# EAGLE board urov schematic_3 (EAGLE 7.5.0)
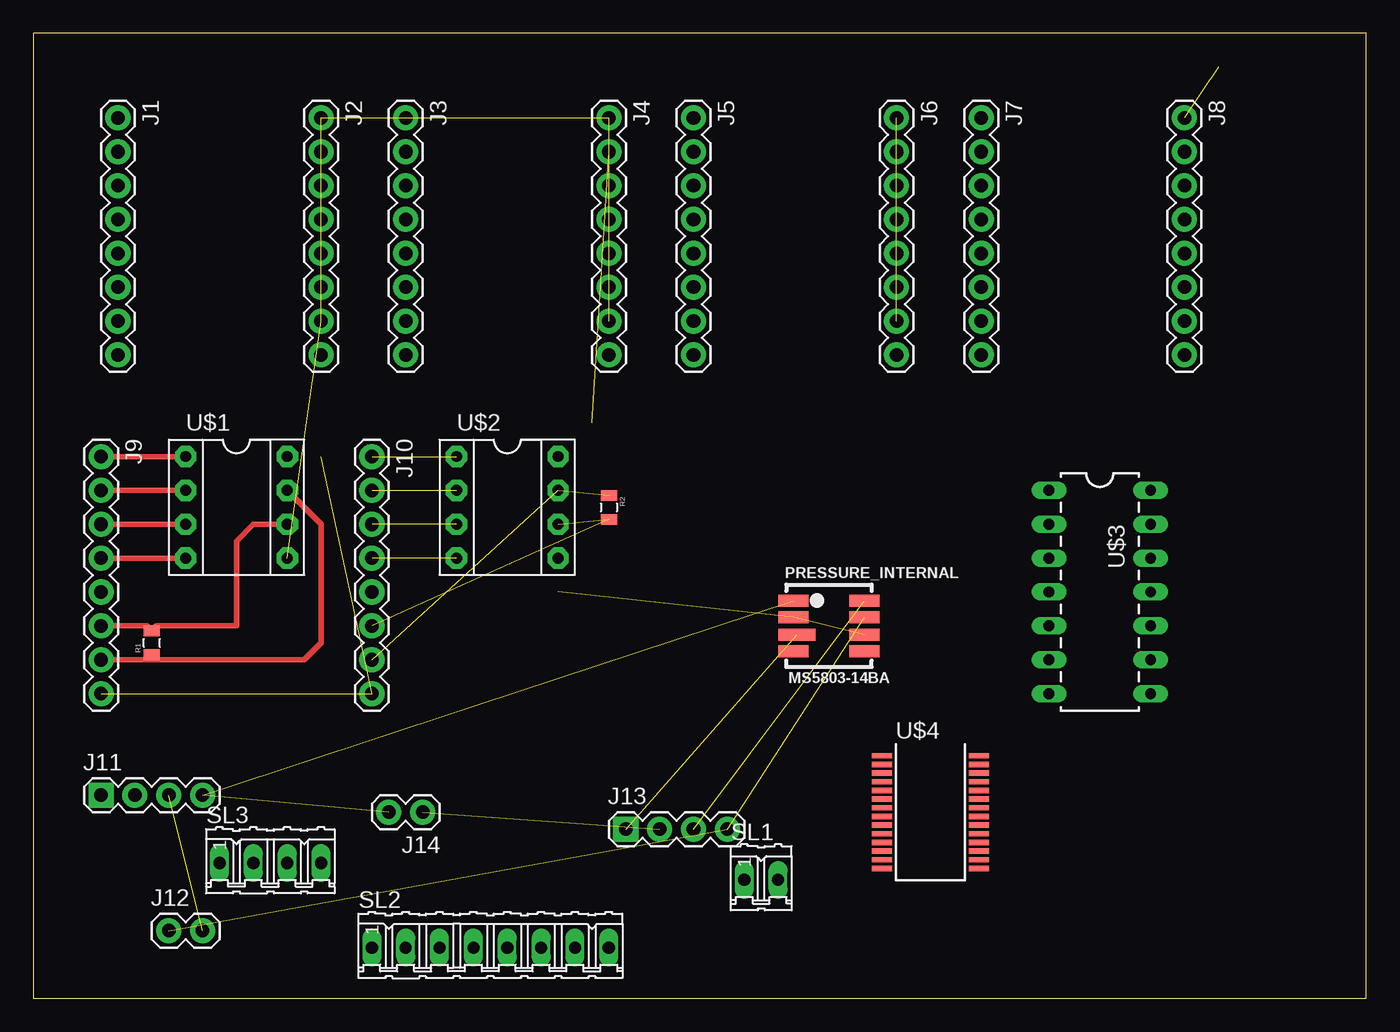
[diagram p0: board, top side]
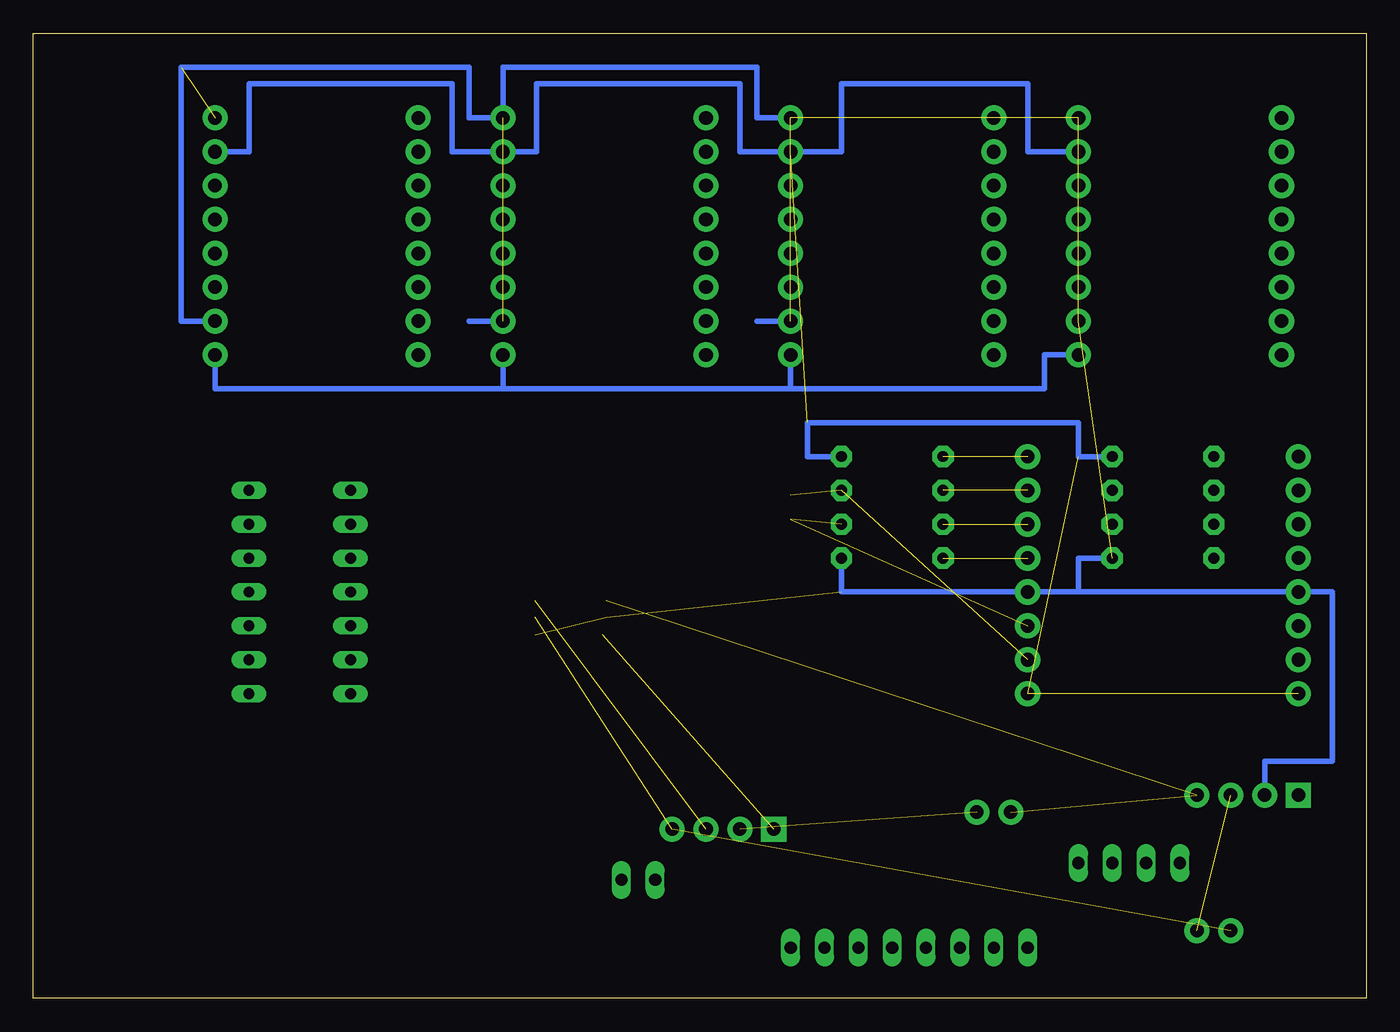
[diagram p1: board, bottom side, seen from below]

Size 100 x 72.38 mm. Coordinates in mm from the lower left corner, seen from the top.
Outline: 0,0 100,0 100,72.38 0,72.38 0,0
Copper layers (1*16): Top 0.035mm / dielectric 1.5mm / Bottom 0.035mm
Design rules "default": minimum track width 10mil, minimum drill 24mil, track to track 8mil, track to pad 8mil, pad to pad 8mil, via to via 8mil, smd to smd 8mil, copper to edge 40mil, drill to drill 8mil, minimum pad ring 10mil, minimum via ring 8mil, stop-mask expansion 4mil, vias tented up to drill 0mil, thermal gap 10mil

## Footprints (pad centres in the part's own frame; a part is rotated, then mirrored left to right if it is on the bottom)
1X08_ROUND = drill 1.016 pad 1.88: 1 0,0; 2 2.54,0; 3 5.08,0; 4 7.62,0; 5 10.16,0; 6 12.7,0; 7 15.24,0; 8 17.78,0
1X04 = drill 1.016 pad 1.88 square: 1 0,0 | drill 1.016 pad 1.88: 2 2.54,0; 3 5.08,0; 4 7.62,0
1X02 = drill 1.016 pad 1.88: 1 0,0; 2 2.54,0
MS5803 = smd 2.25 x 0.9: 1 -2.675,1.9; 2 -2.675,0.65; 4 -2.675,-1.9; 5 2.675,-1.9; 6 2.675,-0.65; 7 2.675,0.65; 8 2.675,1.9 | smd 2.8 x 0.9: 3 -2.4,-0.65
0805 = smd 0.8 x 1.2: 1 -0.9,0; 2 0.9,0
02P = drill 0.914 long: 1 -1.27,0; 2 1.27,0
08P = drill 0.914 long: 1 -8.89,0; 2 -6.35,0; 3 -3.81,0; 4 -1.27,0; 5 1.27,0; 6 3.81,0; 7 6.35,0; 8 8.89,0
04P = drill 0.914 long: 1 -3.81,0; 2 -1.27,0; 3 1.27,0; 4 3.81,0
DIL08 = drill 0.813 pad 1.6 octagon: 1 -3.81,-3.81; 2 -1.27,-3.81; 3 1.27,-3.81; 4 3.81,-3.81; 5 3.81,3.81; 6 1.27,3.81; 7 -1.27,3.81; 8 -3.81,3.81
DIL14 = drill 0.813 long: 1 -8.89,-3.81; 2 -6.35,-3.81; 3 -3.81,-3.81; 4 -1.27,-3.81; 5 1.27,-3.81; 6 3.81,-3.81; 7 6.35,-3.81; 8 6.35,3.81; 9 3.81,3.81; 10 1.27,3.81; 11 -1.27,3.81; 12 -3.81,3.81; 13 -6.35,3.81; 14 -8.89,3.81
28-SSOP = smd 0.4 x 1.5: 1 -4.225,-3.625; 2 -3.575,-3.625; 3 -2.925,-3.625; 4 -2.275,-3.625; 5 -1.625,-3.625; 6 -0.975,-3.625; 7 -0.325,-3.625; 8 0.325,-3.625; 9 0.975,-3.625; 10 1.625,-3.625; 11 2.275,-3.625; 12 2.925,-3.625; 13 3.575,-3.625; 14 4.225,-3.625; 15 4.225,3.625; 16 3.575,3.625; 17 2.925,3.625; 18 2.275,3.625; 19 1.625,3.625; 20 0.975,3.625; 21 0.325,3.625; 22 -0.325,3.625; 23 -0.975,3.625; 24 -1.625,3.625; 25 -2.275,3.625; 26 -2.925,3.625; 27 -3.575,3.625; 28 -4.225,3.625

## Placement (x,y rotation side)
J1  [1X08_ROUND]  6.35,66.04 270 top
J2  [1X08_ROUND]  21.59,66.04 270 top
J3  [1X08_ROUND]  27.94,66.04 270 top
J4  [1X08_ROUND]  43.18,66.04 270 top
J5  [1X08_ROUND]  49.53,66.04 270 top
J6  [1X08_ROUND]  64.77,66.04 270 top
J7  [1X08_ROUND]  71.12,66.04 270 top
J8  [1X08_ROUND]  86.36,66.04 270 top
J9  [1X08_ROUND]  5.08,40.64 270 top
J10  [1X08_ROUND]  25.4,40.64 270 top
J11  [1X04]  5.08,15.24 0 top
J12  [1X02]  10.16,5.08 0 top
J13  [1X04]  44.45,12.7 0 top
J14  [1X02]  29.21,13.97 180 top
PRESSURE_INTERNAL  MS5803-14BA  [MS5803]  59.69,27.94 0 top
R1  120  [0805]  8.89,26.67 90 top
R2  120  [0805]  43.18,36.83 270 top
SL1  [02P]  54.61,8.89 0 top
SL2  [08P]  34.29,3.81 0 top
SL3  [04P]  17.78,10.16 0 top
U$1  MAX485DIL  [DIL08]  15.24,36.83 270 top
U$2  MAX485DIL  [DIL08]  35.56,36.83 270 top
U$3  ATTINY84ATTINY84-20PU  [DIL14]  80.01,29.21 270 top
U$4  MAX4574A  [28-SSOP]  67.31,13.97 270 top

## Library data of the parts
J1-J10 = SparkFun-Connectors; PROD_ID: CONN-08437
J11 J13 = SparkFun-Connectors; PROD_ID: CONN-09696
J12 J14 = SparkFun-Connectors
PRESSURE_INTERNAL = SparkFun-Sensors; PROD_ID: IC-12111
R1 R2 = SparkFun-Passives
SL1-SL3 = con-amp-quick; OC_FARNELL: unknown; OC_NEWARK: unknown
U$1-U$3 = SparkFun-DigitalIC
U$4 = UROV_Accessories

## Nets
1A_1: J2.4
1A_2: J4.4
1A_3: J6.4
1A_4: J8.4
1B_1: J2.3
1B_2: J4.3
1B_3: J6.3
1B_4: J8.3
2A_1: J2.5
2A_2: J4.5
2A_3: J6.5
2A_4: J8.5
2B_1: J2.6
2B_2: J4.6
2B_3: J6.6
2B_4: J8.6
A_DIP8_1: J9.6 R1.2 U$1.6
A_DIP8_2: J10.6 R2.2 U$2.6
B_DIP8_1: J9.7 R1.1 U$1.7
B_DIP8_2: J10.7 R2.1 U$2.7
DIRECTION_1: J1.8
DIRECTION_2: J3.8
DIRECTION_3: J5.8
DIRECTION_4: J7.8
GND: J2.1 J2.7 J4.1 J4.7 J6.1 J6.7 J8.1 J8.7 J9.5 J10.5 J11.2 PRESSURE_INTERNAL.2 PRESSURE_INTERNAL.6 U$1.5 U$2.5
MISO: J13.3 PRESSURE_INTERNAL.8
MOSI: J12.1 J13.4 PRESSURE_INTERNAL.7
MS1_1: J1.2
MS1_2: J3.2
MS1_3: J5.2
MS1_4: J7.2
MS2_1: J1.3
MS2_2: J3.3
MS2_3: J5.3
MS2_4: J7.3
MS3_1: J1.4
MS3_2: J3.4
MS3_3: J5.4
MS3_4: J7.4
N$1: J9.1 U$1.1
N$2: J9.2 U$1.2
N$3: J9.3 U$1.3
N$4: J9.4 U$1.4
N$10: J10.1 U$2.1
N$11: J10.2 U$2.2
N$13: J10.3 U$2.3
N$14: J10.4 U$2.4
SCL: J11.4 J14.2 PRESSURE_INTERNAL.1
SCLK: J13.2 J14.1
SDA: J11.3 J12.2
SS: J13.1 PRESSURE_INTERNAL.3
STEP_1: J1.7
STEP_2: J3.7
STEP_3: J5.7
STEP_4: J7.7
V3.3: PRESSURE_INTERNAL.5
VDD: J2.2 J4.2 J6.2 J8.2 J9.8 J10.8 U$1.8 U$2.8
VDD_9DOF_3.3V: J11.1
VMOT: J2.8 J4.8 J6.8 J8.8
¬ENABLE_1: J1.1
¬ENABLE_2: J3.1
¬ENABLE_3: J5.1
¬ENABLE_4: J7.1
¬RESET_1: J1.5
¬RESET_2: J3.5
¬RESET_3: J5.5
¬RESET_4: J7.5
¬SLEEP_1: J1.6
¬SLEEP_2: J3.6
¬SLEEP_3: J5.6
¬SLEEP_4: J7.6

## Tracks (layer width: path | path; a pad name or v marks a point on that pad's centre or on a via)
A_DIP8_1
  Top 0.406: J9.6 8.52,27.94 R1.2 9.26,27.94 15.24,27.94 15.24,34.29 16.51,35.56 U$1.6
A_DIP8_2  (2 unrouted)
B_DIP8_1
  Top 0.406: R1.1 8.52,25.4 J9.7 20.32,25.4 21.59,26.67 21.59,35.56 U$1.7
B_DIP8_2  (2 unrouted)
GND  (8 unrouted)
  Bottom 0.406: J4.1 45.72,66.04 45.72,69.85 64.77,69.85 J6.1 67.31,66.04 67.31,69.85 88.9,69.85 88.9,50.8 J8.7 | 21.59,30.48 J9.5 2.54,30.48 2.54,17.78 7.62,17.78 J11.2 | 21.59,30.48 21.59,33.02 U$1.5 | 21.59,30.48 J10.5 39.37,30.48 U$2.5 | J4.7 45.72,50.8 | J6.7 67.31,50.8
MISO  (1 unrouted)
MOSI  (2 unrouted)
N$1
  Top 0.406: J9.1 U$1.1
N$2
  Top 0.406: U$1.2 J9.2
N$3
  Top 0.406: J9.3 U$1.3
N$4
  Top 0.406: U$1.4 J9.4
N$10  (1 unrouted)
N$11  (1 unrouted)
N$13  (1 unrouted)
N$14  (1 unrouted)
SCL  (2 unrouted)
SCLK  (1 unrouted)
SDA  (1 unrouted)
SS  (1 unrouted)
VDD  (3 unrouted)
  Bottom 0.406: J2.2 25.4,63.5 25.4,68.58 39.37,68.58 39.37,63.5 J4.2 46.99,63.5 46.99,68.58 62.23,68.58 62.23,63.5 J6.2 68.58,63.5 68.58,68.58 83.82,68.58 83.82,63.5 J8.2 | U$2.8 41.91,40.64 41.91,43.18 21.59,43.18 21.59,40.64 U$1.8
VMOT
  Bottom 0.406: J2.8 24.13,48.26 24.13,45.72 43.18,45.72 | J4.8 43.18,45.72 | 43.18,45.72 64.77,45.72 | J6.8 64.77,45.72 | 64.77,45.72 86.36,45.72 J8.8